# Altium PCB bts7970.PcbDoc
Units mm, origin at the board's own origin, x right, y up, seen from the top; angles counter-clockwise.
Board outline 152.4 x 101.6 mm, 2 copper layers (Top Layer, Bottom Layer); 19 components, 16 nets, 55 pads, 16 vias.
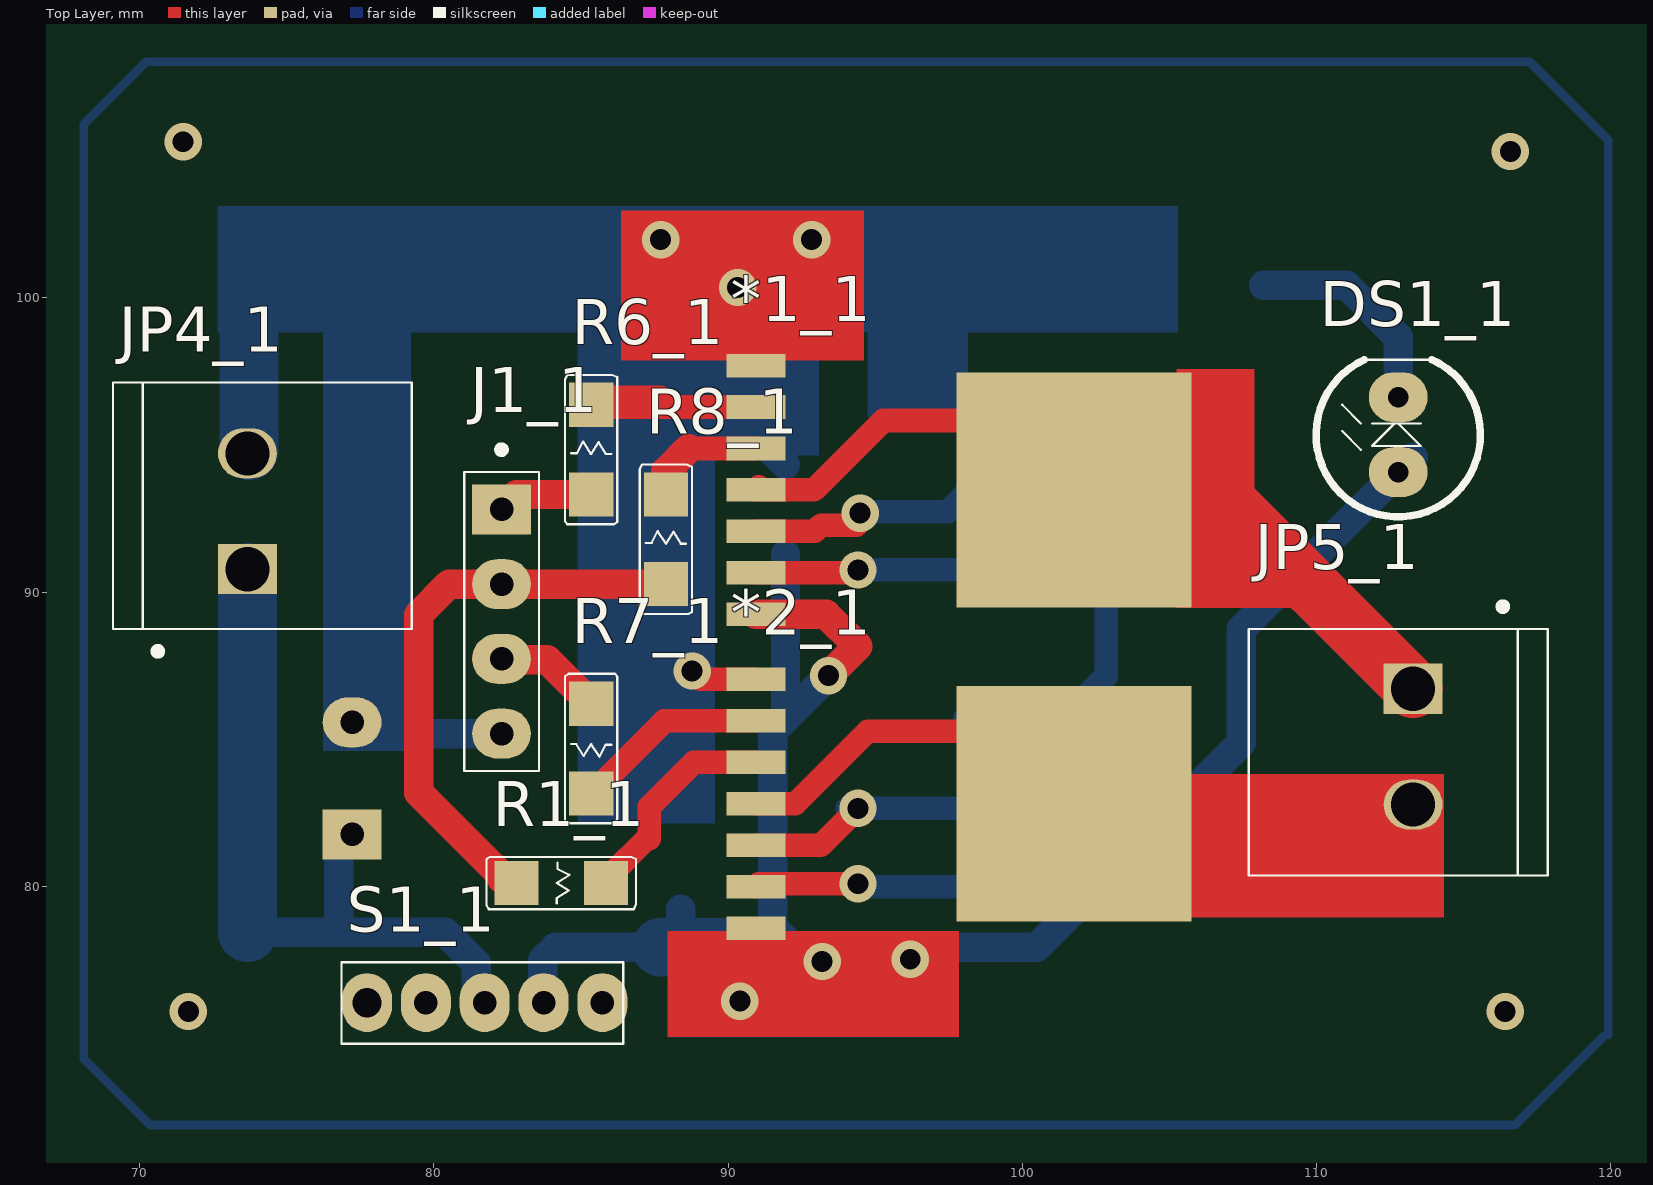
[diagram p0: Top Layer view]
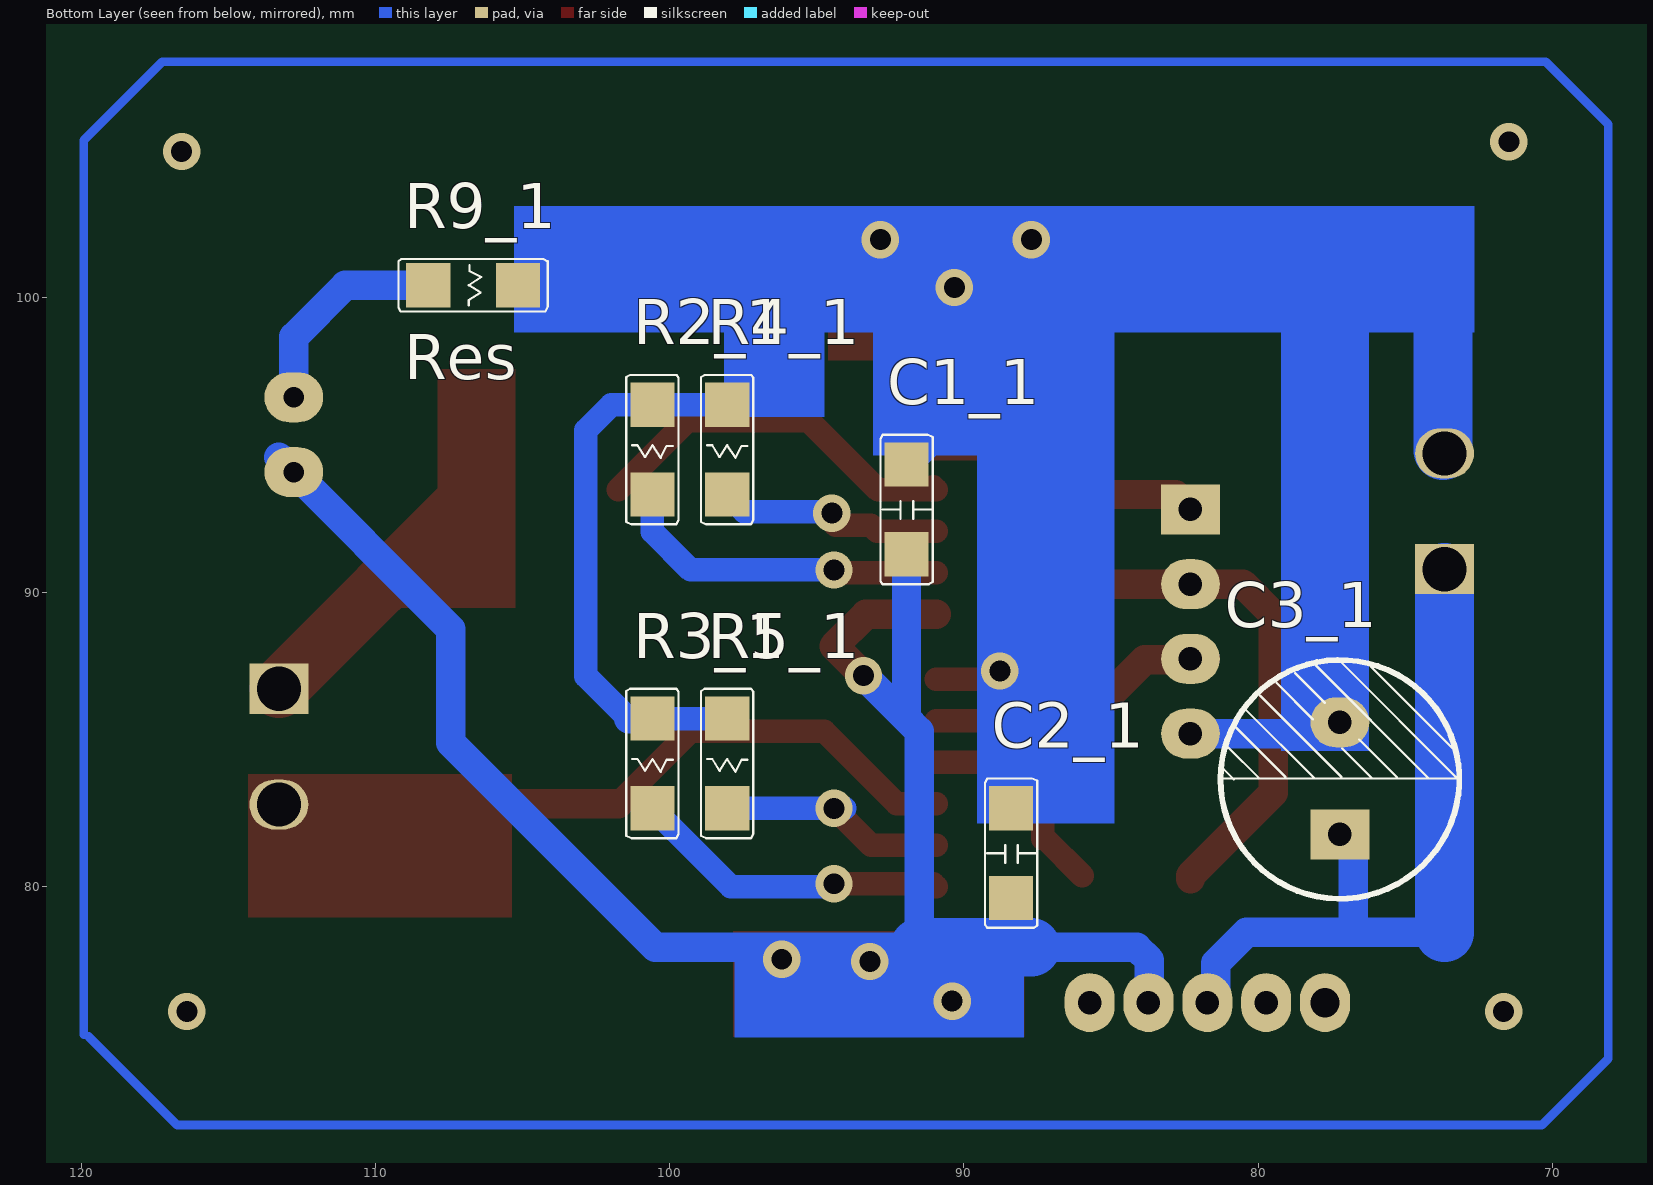
[diagram p1: Bottom Layer view, seen from below]

## Layer stack, top to bottom
Top Layer: signal copper 0.0356
Dielectric: dielectric 0.32, FR-4, Dk 4.8
Bottom Layer: signal copper 0.0356

## Board outline
25.4,25.4 177.8,25.4 177.8,127 25.4,127

## Design rules (kind name [scope] priority, off if disabled: settings)
Clearance [All] p1: gap=0.254
FabricationTestPointUsage TestPointUsage [All] p1: valid=0 allowmultiple=FALSE
FabricationTestpoint Testpoint [All] p1: side=3 testpointundercomponent=TRUE minsize=1.016 maxsize=2.54 preferedsize=1.524 minholesize=0 maxholesize=1.016 preferedholesize=0.813 testpointgrid=0.025 allowsidetop=TRUE allowsidebottom=TRUE usegrid=TRUE gridtolerance=0
PolygonConnect [All] p1: connectstyle=Relief reliefconductorwidth=0.254 reliefentries=4 polygonreliefangle="90 Angle" airgapwidth=0.254
RoutingVias [All] p1: holewidth=0.711 width=1.27 viastyle="Through Hole" minholewidth=0.711 minwidth=1.27 maxholewidth=0.711 maxwidth=1.27
SilkToSolderMaskClearance SilkscreenOverComponentPads [IsPad] p1: minsilkscreentomaskgap=0.254 clearancetoexposedcopper=TRUE
SolderMaskExpansion [All] p1: expansion=0.102
Width [All] p1: maxlimit=0.8 minlimit=0.8 preferedwidth=0.8
25 further rules are at their usual default settings.

## Classes and differential pairs
component class BTS7970: *1_1 *2_1 C1_1 C2_1 DS?_1 R1_1 R2_1 R3_1 R4_1 R5_1 R6_1 R7_1 R? R?_1 S?_1

## Components (designator, comment, footprint, x,y, rotation, side; value= is the part's Value field where it differs from the comment)
*1_1 "bts7970" bts7970 96.012,94.336 r270 top (schematic designator *1)
*2_1 "bts7970" bts7970 96.012,83.668 r270 top (schematic designator *2)
C1_1 "CAP" CC1005-0402 91.948,91.288 r90 bottom (schematic designator C1)
C2_1 "CAP" CC1005-0402 88.392,79.604 r90 bottom (schematic designator C2)
C3_1 "Cap Pol1" RB0.15-0.32 77.216,83.668 r270 bottom (schematic designator C3)
DS1_1 "LED" LED0.1-0.22 112.776,95.352 r90 top (schematic designator DS1)
J1_1 "HEAD4" HDR1-4 82.296,92.812 r0 top (schematic designator J1)
JP4_1 "H-2" H-2/2-T 73.66,90.78 r180 top (schematic designator JP4)
JP5_1 "H-2" H-2/2-T 113.284,86.716 r0 top (schematic designator JP5)
R1_1 "Res" R2012-0805 82.804,80.112 r0 top (schematic designator R1)
R2_1 "Res" R2012-0805 100.584,96.368 r270 bottom (schematic designator R2)
R3_1 "Res" R2012-0805 100.584,85.7 r270 bottom (schematic designator R3)
R4_1 "Res" R2012-0805 98.044,96.368 r270 bottom (schematic designator R4)
R5_1 "Res" R2012-0805 98.044,85.7 r270 bottom (schematic designator R5)
R6_1 "Res" R2012-0805 85.344,93.32 r90 top (schematic designator R6)
R7_1 "Res" R2012-0805 85.344,86.208 r270 top (schematic designator R7)
R8_1 "Res" R2012-0805 87.884,90.272 r90 top (schematic designator R8)
R9_1 "Res" R2012-0805 108.204,100.432 r180 bottom (schematic designator R9)
S1_1 "SW-DIP2" sw--7mm 77.724,76.048 r0 top (schematic designator S1)

## Footprints (in the part's own frame and the unit in brackets; to place one, negate y for a bottom-side part, rotate by r counter-clockwise, add the part's x,y. Pads: shape width x height; smd on the part's side, far side on the other; paste and mask are expansions set on the pad)
bts7970 [mm]
  rect 0.8x2 smd: 1(-3.367,-5.069) 2(-1.957,-5.069) 3(-0.547,-5.069) 4(0.863,-5.069) 5(2.273,-5.069) 6(3.683,-5.069) 7(5.093,-5.069)
  rect 8x8 smd: 8(0.863,5.741)
CC1005-0402 [mm]
  rect 1.5x1.5 smd: 1(0,0) 2(3.048,0)
  silkscreen extent -1.02,-0.89 4.06,0.89
H-2/2-T [mm]
  rect 2x1.7 hole 1.5 unplated: 1(0,0)
  oval 2x1.7 hole 1.5 unplated: 2(0,-3.937)
  silkscreen extent -5.59,-6.35 4.57,2.92
HDR1-4 [mm]
  rect 2x1.7 hole 0.8 unplated: 1(0,0)
  oval 2x1.7 hole 0.8 unplated: 2(0,-2.54) 3(0,-5.08) 4(0,-7.62)
  silkscreen extent -1.27,-8.89 1.27,2.15
LED0.1-0.22 [mm]
  oval 1.7x2 hole 0.7 unplated: 1(-1.27,0) 2(1.27,0)
  silkscreen extent -2.79,-2.79 2.55,2.79
R2012-0805 [mm]
  rect 1.5x1.5 smd: 1(0,0) 2(3.048,0)
  silkscreen extent -1.02,-0.89 4.06,0.89
RB0.15-0.32 [mm]
  rect 1.7x2 hole 0.8 unplated: 1(1.905,0)
  oval 1.7x2 hole 0.8 unplated: 2(-1.905,0)
  silkscreen extent -4.03,-4.06 4.09,4.05
sw--7mm [mm]
  oval 1.7x2 hole 1: 1(0,0)
  oval 1.7x2 hole 0.8: 2(2,0) 3(4,0) 4(6,0) 5(8,0)
  silkscreen extent -0.86,-1.4 8.71,1.37

## Part data
C1_1 C2_1: "Capacitor"
C3_1: library part CAP, "Capacitor"
DS1_1: "Typical RED, GREEN, YELLOW, AMBER GaAs LED"
J1_1: "Connector,4-pin"
JP4_1 JP5_1: library part "Header 2", "Header, 2-Pin"
R1_1 R2_1 R3_1 R4_1 R5_1 R6_1 R7_1 R8_1 R9_1: "Resistor"
S1_1: "DIP Switch,2-bit"

## Via types
v1: diameter 1.27, hole 0.711, Top Layer to Bottom Layer, 16 vias

## Nets (pads, with @x,y where several pads share a name; then routed paths per layer and width w, separated by ;. In a path a pad name is that pad's centre, name@x,y a point inside that pad or via, vN(x,y) a via of type N, cw(c..) or ccw(c..) an arc to the next point about the centre after c; other vN are vias at no path point)
GND: 
INH1: 
INH2: 
IS1: 
IS2: 
MOTO1: 
MOTO2: 
NetDS1_2: 
NetJ1_1: 
NetJ1_2: 
NetJ1_3: 
PWM1: 
PWM2: 
SR1: 
SR2: 
VCC_H: 
pads on no net: *1_1.1 *1_1.2 *1_1.3 *1_1.4 *1_1.5 *1_1.6 *1_1.7 *1_1.8 *2_1.1 *2_1.2 *2_1.3 *2_1.4 *2_1.5 *2_1.6 *2_1.7 *2_1.8 C1_1.1 C1_1.2 C2_1.1 C2_1.2 C3_1.1 C3_1.2 DS1_1.1 DS1_1.2 J1_1.1 J1_1.2 J1_1.3 J1_1.4 JP4_1.1 JP4_1.2 JP5_1.1 JP5_1.2 R1_1.1 R1_1.2 R2_1.1 R2_1.2 R3_1.1 R3_1.2 R4_1.1 R4_1.2 R5_1.1 R5_1.2 R6_1.1 R6_1.2 R7_1.1 R7_1.2 R8_1.1 R8_1.2 R9_1.1 R9_1.2 S1_1.1 S1_1.2 S1_1.3 S1_1.4 S1_1.5
copper on no net: | length 445.6
  Top Layer w0.8: 85.344,83.16 85.369,83.16 87.834,85.624 90.943,85.624 ; 85.344,96.368 85.419,96.292 90.943,96.292 ; 85.979,80.366 87.234,81.62 87.325,81.62 87.325,82.702 88.837,84.214 90.943,84.214 ; 88.659,94.882 90.943,94.882 ; v1(88.777,87.321) 89.064,87.034 90.943,87.034 ; 90.943,79.984 91.045,80.086 v1(94.412,80.086) ; 90.943,81.394 93.154,81.394 v1(94.412,82.652) ; 90.943,82.804 92.278,82.804 94.742,85.268 99.289,85.268 101.753,82.804 ; 90.943,90.652 94.31,90.652 v1(94.412,90.754) ; 90.943,92.062 92.943,92.062 93.159,92.278 94.361,92.278 v1@94.412,92.329 ; 91.044,93.574 90.943,93.472 92.913,93.472 95.275,95.834 99.391,95.834 101.753,93.472
  Top Layer w1: 81.788,87.732 81.813,87.706 83.845,87.706 85.344,86.208 ; 82.296,80.264 82.296,80.366 79.477,83.185 79.477,89.23 80.518,90.272 82.296,90.272 84.582,90.272 ; 82.296,92.812 82.804,93.32 85.344,93.32 ; 85.344,90.272 84.582,90.272 ; 85.726,96.52 87.681,96.52 ; 87.884,90.272 84.582,90.272 ; 87.884,93.32 87.884,94.107 88.659,94.882 ; 90.943,89.242 93.333,89.242 94.412,88.163 v1(93.41,87.162) ; 101.753,82.804 113.31,82.804 ; 107.315,89.967 109.931,89.967 ; 107.417,90.754 108.026,90.754 108.229,90.551
  Top Layer w2: 106.527,93.472 113.284,86.716
  Bottom Layer w0.3: 119.748,74.892 116.738,71.882 70.358,71.882 68.097,74.143 68.097,105.901 70.222,108.026 117.246,108.026 119.913,105.359 119.913,74.955
  Bottom Layer w0.8: v1@94.056,82.652 v1(94.412,82.652) 98.044,82.652 ; v1(94.412,80.086) 94.513,79.985 97.917,79.985 100.584,82.652 ; v1(94.412,90.754) 99.289,90.754 100.584,92.05 100.584,93.32 ; v1@94.818,92.735 97.46,92.735 98.044,93.32 ; 98.044,85.7 100.584,85.7 ; 98.044,96.368 100.584,96.368 101.981,96.368 102.845,95.504 102.845,87.147 101.397,85.7
  Bottom Layer w1: 73.66,78.435 76.759,78.435 ; 76.759,81.305 76.759,78.435 ; 78.562,87.859 78.689,87.732 ; 79.197,85.192 82.296,85.192 ; 81.432,76.022 81.432,77.394 80.391,78.435 77.673,78.435 77.368,78.435 76.759,78.435 ; 83.693,75.77 83.693,77.495 84.125,77.927 87.681,77.927 88.392,78.638 88.392,79.223 ; 88.392,82.855 v1@88.392,87.249 ; 89.078,97.206 91.948,94.336 ; 91.948,91.288 91.948,85.7 ; v1(93.41,87.162) 91.948,85.7 ; 100.584,85.7 101.397,85.7 ; 108.204,100.432 111.023,100.432 112.776,98.679 112.776,96.622 ; 113.284,94.59 107.442,88.748 107.442,84.887 100.482,77.927 91.516,77.927 91.516,85.268 91.948,85.7
  Bottom Layer w2: 73.66,78.435 73.66,90.678 ; 73.711,94.818 73.711,101.981 ; 87.706,77.927 91.516,77.927
  other v1: 71.653,75.743 116.408,75.743 90.399,76.098 93.193,77.445 96.19,77.521 94.488,92.685 90.322,100.355 87.706,101.981 92.837,101.981 116.586,104.978 71.476,105.308

## Other copper
Top Layer:
  region: 86.36,102.972 86.36,97.866 94.615,97.866 94.615,102.972
  region: 105.359,83.82 105.359,78.943 114.325,78.943 114.325,83.82
  region: 105.232,97.587 105.232,89.459 107.899,89.459 107.899,97.587
  region: 87.935,78.486 87.935,74.879 97.841,74.879 97.841,78.486
Bottom Layer:
  region: 72.644,103.124 72.644,98.831 105.283,98.831 105.283,103.124
  region: 94.742,101.041 94.742,95.961 98.146,95.961 98.146,101.041
  region: 76.225,102.311 76.225,84.607 79.223,84.607 79.223,102.311
  region: 84.887,102.895 84.887,82.144 89.56,82.144 89.56,102.895
  region: 88.011,102.895 88.011,94.64 93.091,94.64 93.091,102.895
  region: 87.96,78.435 87.96,74.854 97.79,74.854 97.79,78.435